# EAGLE board MRCS-Nano-Ard-Relay-Breakout (EAGLE 7.7.0)
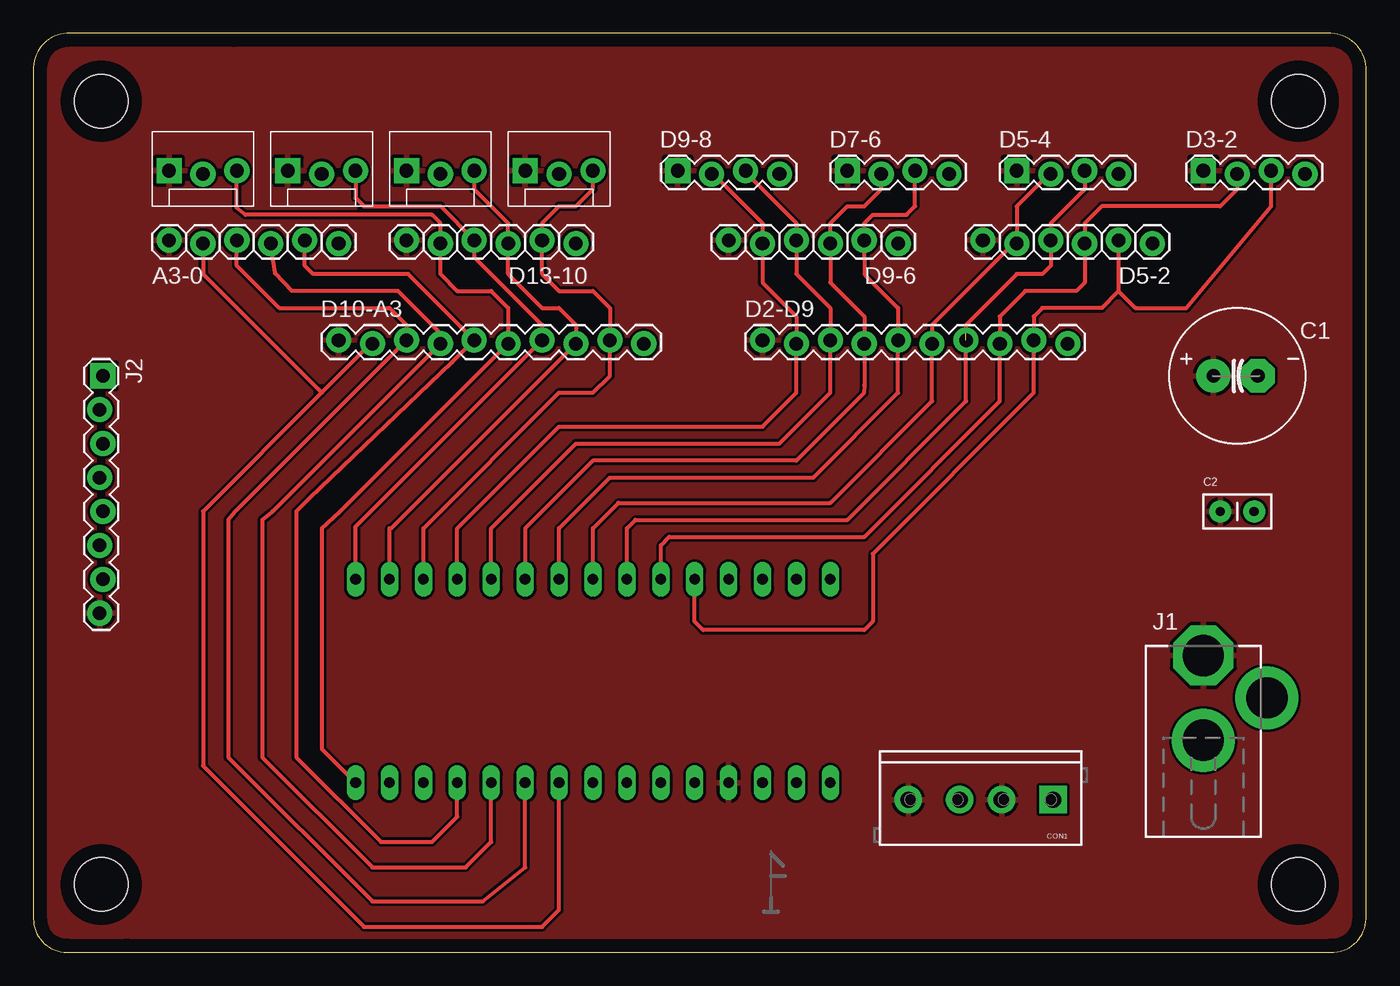
[diagram p0: board, top side]
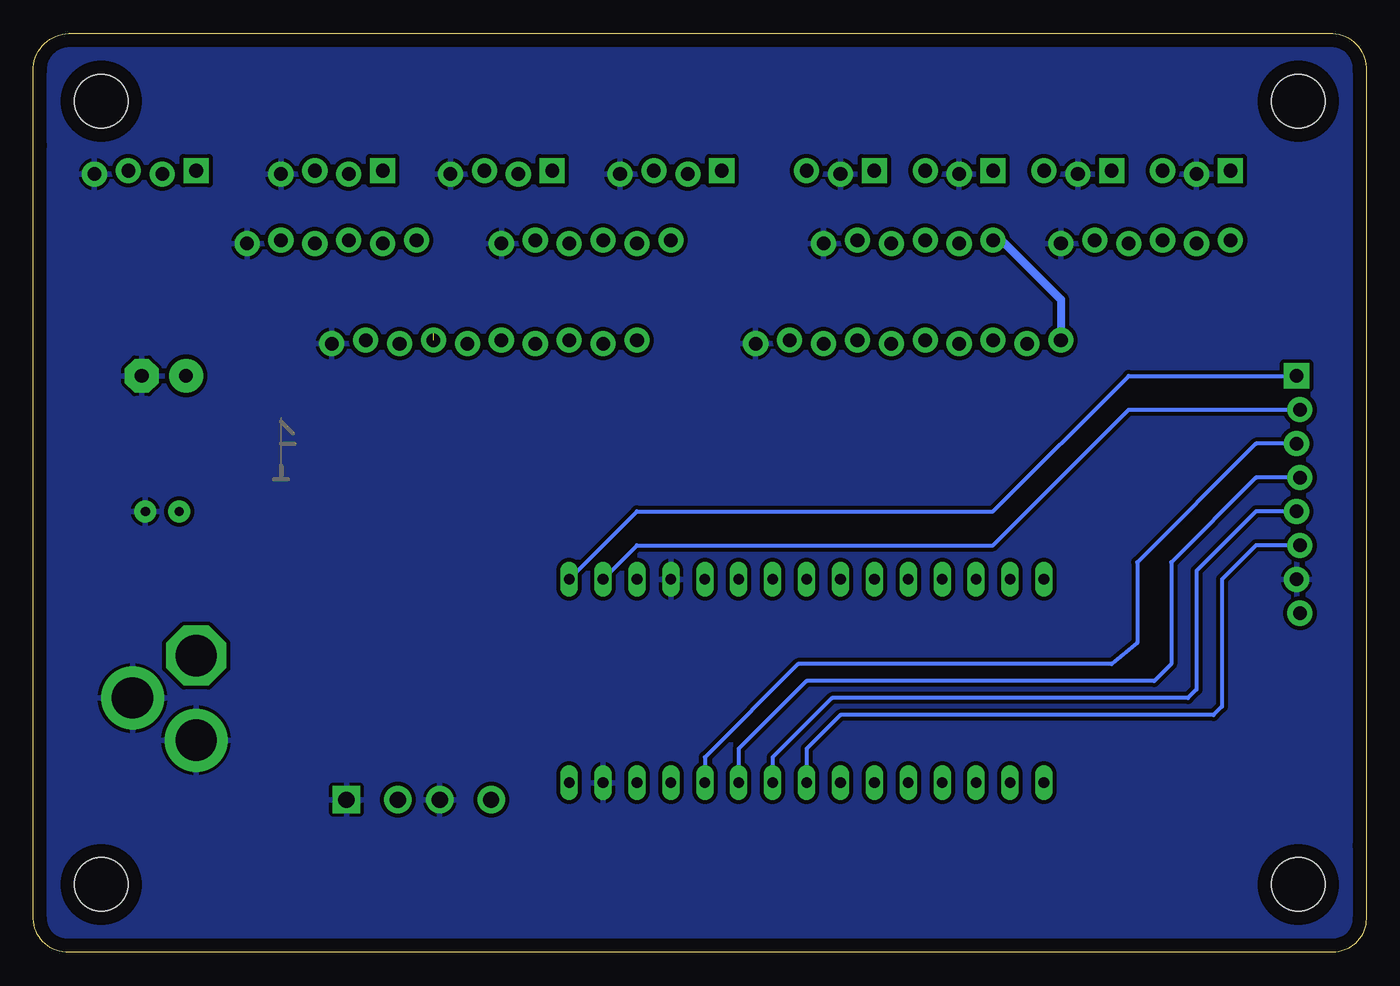
[diagram p1: board, bottom side, seen from below]

Size 99.82 x 68.83 mm. Coordinates in mm from the lower left corner, seen from the top.
Copper layers (1*16): Top 0.035mm / dielectric 1.5mm / Bottom 0.035mm
Design rules "default": minimum track width 10mil, minimum drill 24mil, track to track 8mil, track to pad 8mil, pad to pad 8mil, via to via 8mil, smd to smd 8mil, copper to edge 40mil, drill to drill 8mil, minimum pad ring 10mil, minimum via ring 8mil, stop-mask expansion 4mil, vias tented up to drill 0mil, thermal gap 10mil
Net classes: 0 default: width 0.305 mm; 1 Power: width 0.61 mm

## Footprints (pad centres in the part's own frame; a part is rotated, then mirrored left to right if it is on the bottom)
1X06_LOCK = drill 1.016 pad 1.88: 1 0,0; 2 2.54,-0.254; 3 5.08,0; 4 7.62,-0.254; 5 10.16,0; 6 12.7,-0.254
E3.5-10 = drill 1.016 pad 2.54: + -1.79,0 | drill 1.016 pad 2.54 octagon: - 1.54,0
C-PTH-0.100 = drill 0.7 pad 1.651: 1 -1.27,0; 2 1.27,0
SCREWTERMINAL-3.5MM-4_LOCK = drill 1.2 pad 2.032 square: 1 -0.178,0 | drill 1.2 pad 2.032: 2 3.678,0; 3 6.822,0; 4 10.678,0
1X10_LOCK = drill 1.016 pad 1.88: 1 0,0.127; 2 2.54,-0.127; 3 5.08,0.127; 4 7.62,-0.127; 5 10.16,0.127; 6 12.7,-0.127; 7 15.24,0.127; 8 17.78,-0.127; 9 20.32,0.127; 10 22.86,-0.127
1X04_LOCK = drill 1.016 pad 1.88 square: 1 0,0.127 | drill 1.016 pad 1.88: 2 2.54,-0.127; 3 5.08,0.127; 4 7.62,-0.127
MOLEX-1X3_LOCK = drill 1.016 pad 1.88 square: 1 0,0.127 | drill 1.016 pad 1.88: 2 2.54,-0.127; 3 5.08,0.127
DCJ0202 = drill 3.1 pad 4.5 octagon: 1 0,3.175 | drill 3.1 pad 4.7: 2 4.763,0; 3 0,-3.175
1X08_LOCK = drill 1.016 pad 1.88 square: 1 0,0.127 | drill 1.016 pad 1.88: 2 2.54,-0.127; 3 5.08,0.127; 4 7.62,-0.127; 5 10.16,0.127; 6 12.7,-0.127; 7 15.24,0.127; 8 17.78,-0.127
NANO = drill 0.8 long: 3.3V -10.16,24.13; 5V -10.16,-1.27; A0 -10.16,19.05; A1 -10.16,16.51; A2 -10.16,13.97; A3 -10.16,11.43; A4 -10.16,8.89; A5 -10.16,6.35; A6 -10.16,3.81; A7 -10.16,1.27; AREF -10.16,21.59; D2 5.08,1.27; D3 5.08,3.81; D4 5.08,6.35; D5 5.08,8.89; D6 5.08,11.43; D7 5.08,13.97; D8 5.08,16.51; D9 5.08,19.05; D10 5.08,21.59; D11 5.08,24.13; D12 5.08,26.67; D13 -10.16,26.67; GND -10.16,-6.35; GND1 5.08,-1.27; RAW -10.16,-8.89; RST -10.16,-3.81; RST1 5.08,-3.81; RX1 5.08,-6.35; TX0 5.08,-8.89
BOARD-DINRAIL-2.7IN = hole 4: 94.742,5.08; 5.08,63.754; 94.742,63.754; 5.08,5.08

## Placement (x,y rotation side)
A3-0  [1X06_LOCK]  10.16,53.34 0 top
C1  470 uF @ 16V  [E3.5-10]  90.17,43.18 0 top
C2  .1 @ 25V  [C-PTH-0.100]  90.17,33.02 0 top
CON1  5V PWR  [SCREWTERMINAL-3.5MM-4_LOCK]  76.2,11.43 180 top
D2-D9  CONNECTOR-M10LOCK  [1X10_LOCK]  54.61,45.72 0 top
D3-2  [1X04_LOCK]  87.63,58.42 0 top
D5-2  [1X06_LOCK]  71.12,53.34 0 top
D5-4  [1X04_LOCK]  73.66,58.42 0 top
D7-6  [1X04_LOCK]  60.96,58.42 0 top
D9-6  [1X06_LOCK]  52.07,53.34 0 top
D9-8  [1X04_LOCK]  48.26,58.42 0 top
D10  CONNECTOR-M03MOLEX-254-LOCK  [MOLEX-1X3_LOCK]  36.83,58.42 0 top
D10-A3  CONNECTOR-M10LOCK  [1X10_LOCK]  22.86,45.72 0 top
D11  CONNECTOR-M03MOLEX-254-LOCK  [MOLEX-1X3_LOCK]  27.94,58.42 0 top
D12  CONNECTOR-M03MOLEX-254-LOCK  [MOLEX-1X3_LOCK]  19.05,58.42 0 top
D13  CONNECTOR-M03MOLEX-254-LOCK  [MOLEX-1X3_LOCK]  10.16,58.42 0 top
D13-10  [1X06_LOCK]  27.94,53.34 0 top
J1  5V PWR  [DCJ0202]  87.63,19.05 0 top
J2  Unused I/O  [1X08_LOCK]  5.08,43.18 270 top
U$1  NANO  [NANO]  50.8,22.86 90 top
U$2  [CA-PROP65WARNING]  45.72,38.1 0 top
U$3  [MRCSLOGOTOP]  53.98,2.54 0 top
U$4  [MRCSLOGOBTM]  74.93,34.92 0 top
U$10  [BOARD-DINRAIL-2.7IN]  0,0 0 top

## Library data of the parts
A3-0 C1 C2 CON1 D2-D9 D3-2 D5-2 D5-4 D7-6 D9-6 D9-8 D10 D10-A3 D11-D13 D13-10 J1 J2 = SPCoast
U$1 = Arduino-clone-scn
U$2 = MRCS-prop65warningBtm
U$3 = MRCSLogoTop
U$4 = MRCSLogoBtm
U$10 = SPCoast-minimal

## Nets
5V [Power]: A3-0.1 C1.+ C2.1 CON1.2 CON1.4 D2-D9.1 D3-2.1 D5-2.1 D5-4.1 D7-6.1 D9-6.1 D9-8.1 D10-A3.1 D10.1 D11.1 D12.1 D13-10.1 D13.1 J1.1 J2.8 U$1.5V
A4: J2.6 U$1.A4
A5: J2.5 U$1.A5
A6: J2.4 U$1.A6
A7: J2.3 U$1.A7
GND [Power]: A3-0.6 C1.- C2.2 CON1.1 CON1.3 D2-D9.10 D3-2.4 D5-2.6 D5-4.4 D7-6.4 D9-6.6 D9-8.4 D10-A3.10 D10.2 D11.2 D12.2 D13-10.6 D13.2 J1.2 J1.3 J2.7 U$1.GND U$1.GND1
N$3: D2-D9.9 D3-2.3 D5-2.5 U$1.D2
N$4: D2-D9.8 D3-2.2 D5-2.4 U$1.D3
N$7: D2-D9.5 D7-6.3 D9-6.5 U$1.D6
N$8: D2-D9.4 D7-6.2 D9-6.4 U$1.D7
N$9: D2-D9.3 D9-6.3 D9-8.3 U$1.D8
N$10: D2-D9.2 D9-6.2 D9-8.2 U$1.D9
N$11: D10-A3.9 D10.3 D13-10.5 U$1.D10
N$12: D10-A3.8 D11.3 D13-10.4 U$1.D11
N$13: D10-A3.7 D12.3 D13-10.3 U$1.D12
N$14: D10-A3.6 D13-10.2 D13.3 U$1.D13
N$15: A3-0.5 D10-A3.5 U$1.A0
N$16: A3-0.4 D10-A3.4 U$1.A1
N$17: A3-0.3 D10-A3.3 U$1.A2
N$18: A3-0.2 D10-A3.2 U$1.A3
N$19: D2-D9.7 D5-2.3 D5-4.3 U$1.D4
N$23: D2-D9.6 D5-2.2 D5-4.2 U$1.D5
RX1: J2.2 U$1.RX1
TX0: J2.1 U$1.TX0

## Tracks (layer width: path | path; a pad name or v marks a point on that pad's centre or on a via)
5V
  Bottom 0.61: D13-10.1 27.31,53.34 22.86,48.9 D10-A3.1
  pour Top: -0.63,69.22 100.33,69.22 100.33,0 0,0
A4
  Bottom 0.305: J2.6 8.26,30.48 10.8,27.94 10.8,18.41 11.43,17.78 39.37,17.78 41.91,15.24 U$1.A4
A5
  Bottom 0.305: J2.5 8.26,33.02 12.7,28.57 12.7,19.68 13.34,19.05 40.01,19.05 44.45,14.61 U$1.A5
A6
  Bottom 0.305: J2.4 8.26,35.56 14.61,29.21 14.61,21.59 15.88,20.32 41.91,20.32 46.99,15.24 U$1.A6
A7
  Bottom 0.305: J2.3 8.26,38.1 17.15,29.21 17.15,23.18 19.05,21.59 42.55,21.59 49.53,14.61 U$1.A7
GND
  pour Bottom (isolate 0.305): -0.63,69.22 100.33,69.22 100.33,0 0,0
N$3
  Top 0.305: 81.28,49.53 80.01,48.26 75.57,48.26 74.93,47.62 D2-D9.9 74.93,41.91 62.87,29.84 62.87,24.77 62.23,24.13 50.17,24.13 49.53,24.77 U$1.D2 | D5-2.5 81.28,49.53 | 81.28,49.53 82.55,48.26 86.36,48.26 92.71,55.88 D3-2.3
N$4
  Top 0.305: D3-2.2 90.17,57.15 88.9,55.88 80.01,55.88 78.74,54.61 D5-2.4 78.74,50.16 78.11,49.53 74.3,49.53 72.39,47.62 D2-D9.8 72.39,41.27 62.23,31.11 47.63,31.11 46.99,30.48 U$1.D3
N$7
  Top 0.305: D7-6.3 66.04,55.88 65.41,55.24 62.87,55.24 62.23,54.61 D9-6.5 62.29,50.74 64.77,48.26 D2-D9.5 64.77,41.91 58.42,35.56 43.18,35.56 39.37,31.75 U$1.D6
N$8
  Top 0.305: 63.38,58.29 D7-6.2 63.5,57.15 62.23,55.88 60.96,55.88 59.69,54.61 D9-6.4 59.69,50.16 62.23,47.62 D2-D9.4 62.23,42.48 62.2,41.88 57.15,36.83 41.91,36.83 36.83,31.75 U$1.D7
N$9
  Top 0.305: D9-8.3 53.34,58.42 57.15,54.61 D9-6.3 57.15,50.8 59.69,48.26 D2-D9.3 59.69,41.91 55.88,38.1 40.64,38.1 34.29,31.75 U$1.D8
N$10
  Top 0.305: D9-8.2 50.93,58.29 54.61,54.61 D9-6.2 54.61,50.16 57.15,47.62 D2-D9.2 57.15,41.91 54.61,39.37 39.37,39.37 31.75,31.75 U$1.D9
N$11
  Top 0.305: U$1.D10 29.21,31.75 39.37,41.91 41.91,41.91 43.18,43.18 D10-A3.9 43.18,48.26 41.91,49.53 39.37,49.53 38.1,50.8 D13-10.5 38.1,54.61 39.37,55.88 40.64,55.88 41.91,57.15 D10.3
N$12
  Top 0.305: D13-10.4 35.56,50.8 38.1,48.26 39.37,48.26 40.64,46.99 D10-A3.8 26.8,31.75 26.67,31.75 U$1.D11 | 35.56,53.34 D13-10.4 | D13-10.4 35.56,54.61 33.02,57.15 D11.3
N$13
  Top 0.305: U$1.D12 24.13,31.88 D10-A3.7 38.1,46.99 33.02,52.07 D13-10.3 30.48,55.88 24.77,55.88 24.13,56.52 D12.3
N$14
  Top 0.305: U$1.D13 21.59,15.24 21.59,31.75 22.99,33.02 D10-A3.6 35.56,48.26 34.29,49.53 31.75,49.53 30.48,50.8 D13-10.2 30.48,54.61 29.85,55.24 15.88,55.24 15.24,55.75 D13.3
N$15
  Top 0.305: U$1.A0 31.75,10.16 29.85,8.26 26.04,8.26 19.69,14.61 19.69,33.02 20.7,34.03 31.37,44.2 D10-A3.5 28.07,50.8 20.96,50.8 20.32,51.44 A3-0.5
N$16
  Top 0.305: U$1.A1 34.29,8.26 32.39,6.35 25.4,6.35 17.15,14.61 17.15,32.38 17.91,33.02 D10-A3.4 30.48,46.35 27.31,49.53 19.37,49.53 18.1,50.86 A3-0.4
N$17
  Top 0.305: U$1.A2 36.83,6.35 33.66,3.81 25.4,3.81 14.61,14.61 14.61,32.38 15.12,33.02 D10-A3.3 27.94,46.99 26.67,48.26 18.42,48.26 15.24,51.44 A3-0.3
N$18
  Top 0.305: D10-A3.2 24.86,45.18 21.59,41.91 | 21.59,41.91 12.7,33.02 12.7,13.97 24.77,1.91 38.1,1.91 39.37,3.17 U$1.A3 | A3-0.2 12.7,50.8 21.59,41.91
N$19  (1 unrouted)
  Top 0.305: D5-4.3 78.74,57.15 76.2,54.61 D5-2.3 76.2,51.44 75.57,50.8 73.66,50.8 69.85,46.99 69.85,46.35 | U$1.D4 44.45,31.75 45.09,32.38 60.96,32.38 69.85,41.27 D2-D9.7
N$23
  Top 0.305: D5-4.2 76.08,58.29 73.66,55.88 D5-2.2 73.41,53.09 67.31,46.99 D2-D9.6 67.31,41.27 59.69,33.66 43.82,33.66 41.91,31.75 U$1.D5
RX1
  Bottom 0.305: U$1.RX1 54.61,30.48 27.94,30.48 17.78,40.64 J2.2
TX0
  Bottom 0.305: U$1.TX0 54.61,33.02 27.94,33.02 17.78,43.18 J2.1

## Text on the board
tDocu: D13 D12 D11 D10 | G | IN | G | G | G | G | G | G | +5 | G | G | G | Arduino Nano | USB | TX0 / RX1 / A7 / A6 / A5 / A4 / GND / +5 | 5VDC | Arduino Relay Controller / Version 1.1 20220401 | Seth Neumann / Jon Schmidt | 5G5G